# EAGLE board Wash_Hand_v1.1 (EAGLE 9.6.1)
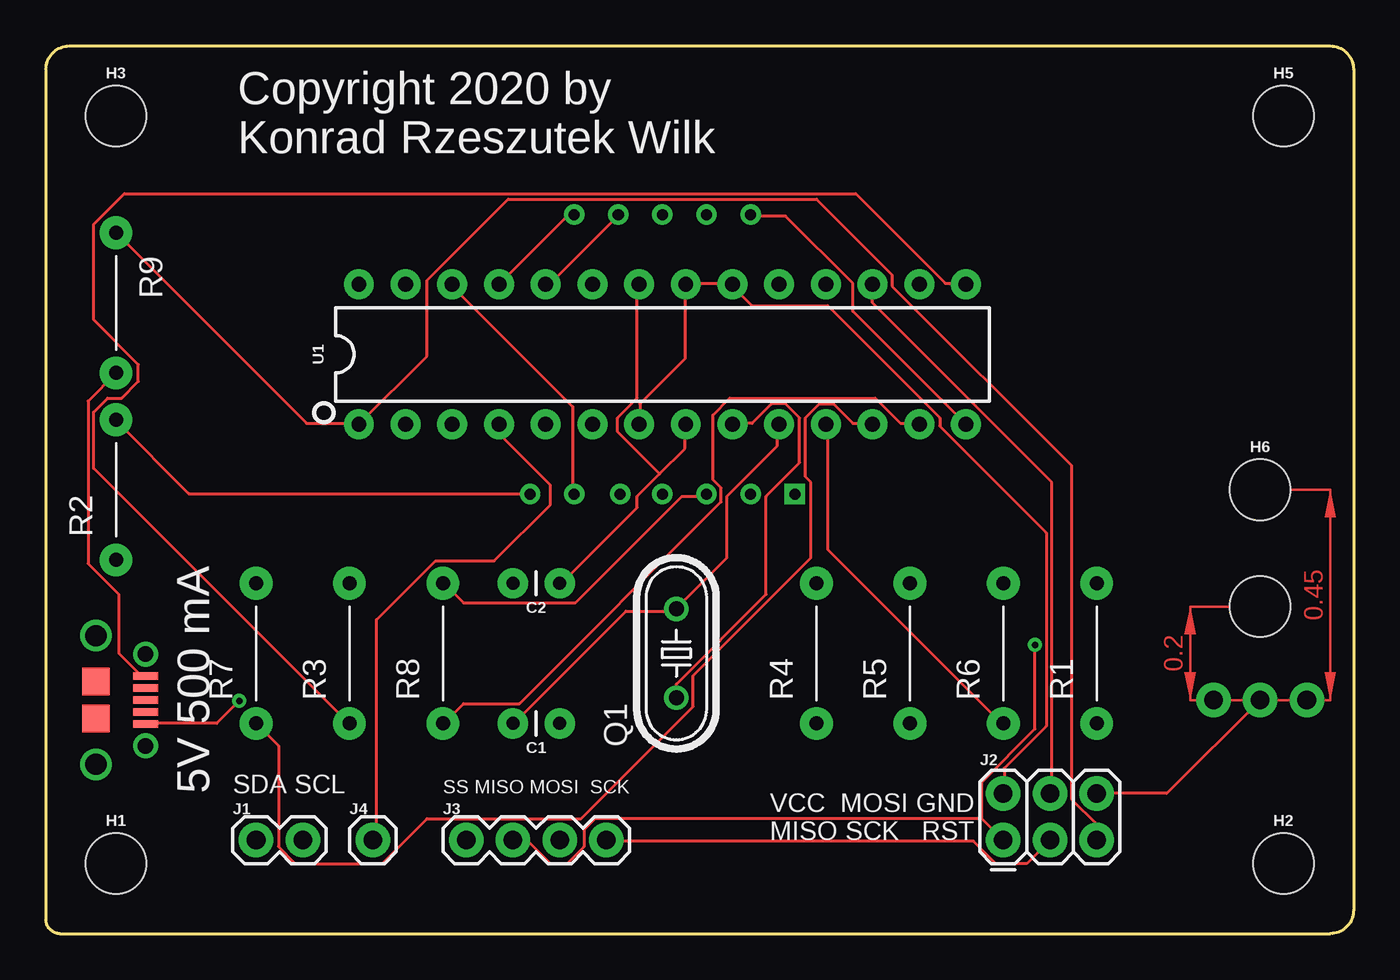
[diagram p0: board, top side]
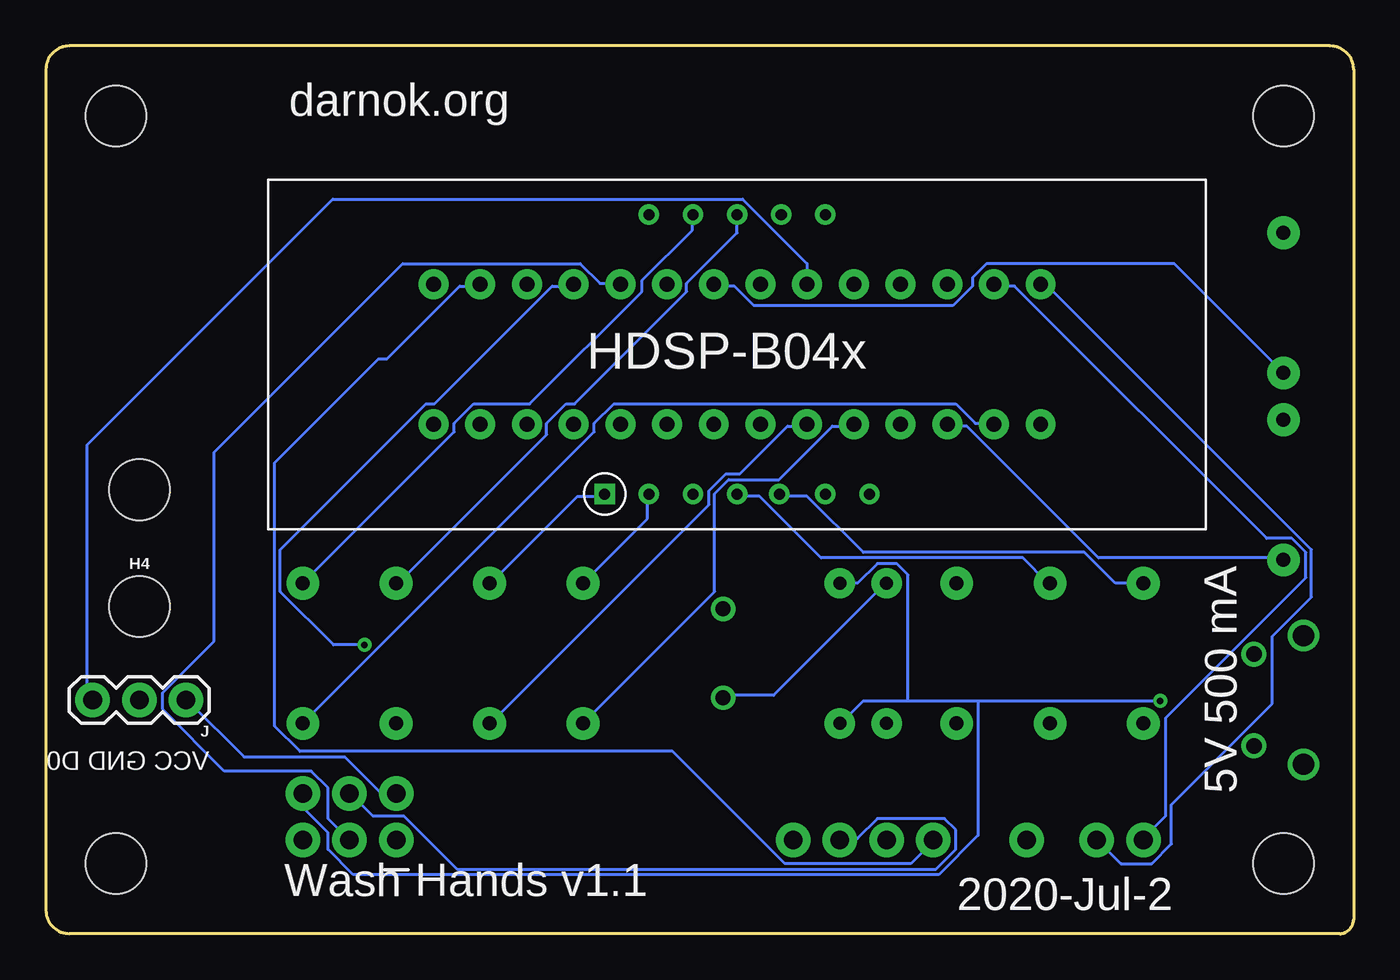
[diagram p1: board, bottom side, seen from below]

Size 71.12 x 48.26 mm. Coordinates in mm from the lower left corner, seen from the top.
Outline: 0,46.99 0,0.76 arc90 0.76,0 69.85,0 arc90 71.12,1.27 71.12,46.99 arc90 69.85,48.26 1.27,48.26 arc90 0,46.99
Copper layers (1*16): Top 0.035mm / dielectric 1.5mm / Bottom 0.035mm
Design rules "default": minimum track width 6mil, minimum drill 0.35mm, track to track 6mil, track to pad 6mil, pad to pad 6mil, via to via 6mil, smd to smd 6mil, copper to edge 40mil, drill to drill 6mil, minimum pad ring 10mil, minimum via ring 8mil, stop-mask expansion 4mil, vias tented up to drill 0mil, thermal gap 10mil

## Footprints (pad centres in the part's own frame; a part is rotated, then mirrored left to right if it is on the bottom)
CAP-PTH-2.54 = drill 0.7 pad 1.651: 1 -1.27,0; 2 1.27,0
STAND-OFF = hole 3.302: 0,0
1X03 = drill 1.016 pad 1.88: 1 0,0; 2 2.54,0; 3 5.08,0
1X02 = drill 1.016 pad 1.88: 1 0,0; 2 2.54,0
2X3 = drill 1.016 pad 1.88: 1 0,0; 2 0,2.54; 3 2.54,0; 4 2.54,2.54; 5 5.08,0; 6 5.08,2.54
1X04 = drill 1.016 pad 1.88: 1 0,0; 2 2.54,0; 3 5.08,0; 4 7.62,0
1X01 = drill 1.016 pad 1.88: 1 0,0
HC49/S = drill 0.813: 1 -2.413,0; 2 2.413,0
RESISTOR = drill 0.762 pad 1.778: R_1 0,0; R_2 7.62,0
DIP28 = drill 0.813 pad 1.626: 1 -16.51,-3.81; 2 -13.97,-3.81; 3 -11.43,-3.81; 4 -8.89,-3.81; 5 -6.35,-3.81; 6 -3.81,-3.81; 7 -1.27,-3.81; 8 1.27,-3.81; 9 3.81,-3.81; 10 6.35,-3.81; 11 8.89,-3.81; 12 11.43,-3.81; 13 13.97,-3.81; 14 16.51,-3.81; 15 16.51,3.81; 16 13.97,3.81; 17 11.43,3.81; 18 8.89,3.81; 19 6.35,3.81; 20 3.81,3.81; 21 1.27,3.81; 22 -1.27,3.81; 23 -3.81,3.81; 24 -6.35,3.81; 25 -8.89,3.81; 26 -11.43,3.81; 27 -13.97,3.81; 28 -16.51,3.81
USB_MICROB_10118194_AMPHENOL = smd 0.4 x 1.35: 1 -1.3,4.15; 2 -0.65,4.15; 3 0,4.15; 4 0.65,4.15; 5 1.3,4.15 | smd 1.5 x 1.5: P$1 -1,1.45; P$2 1,1.45 | drill 0.85 pad 1.25: P$8 -2.5,4.15; P$9 2.5,4.15 | drill 1.15 pad 1.55: P$10 -3.5,1.45; P$11 3.5,1.45
HDSP-B0XE = drill 0.6: PIN12 -4.8,7.6; PIN$2 -4.8,-7.6; PIN$3 -2.4,-7.6; PIN$4 0,-7.6; PIN$5 2.3,-7.6; PIN$6 4.8,-7.6; PIN$7 7.2,-7.6; PIN$8 4.8,7.6; PIN$9 2.4,7.6; PIN$10 0,7.6; PIN$11 -2.4,7.6 | drill 0.6 square: PIN$1 -7.2,-7.6

## Placement (x,y rotation side)
C1  22pF  [CAP-PTH-2.54]  26.67,11.43 180 top
C2  22pF  [CAP-PTH-2.54]  26.67,19.05 180 top
H1  STAND-OFF  [STAND-OFF]  3.81,3.81 0 top
H2  STAND-OFF  [STAND-OFF]  67.31,3.81 0 top
H3  STAND-OFF  [STAND-OFF]  3.81,44.45 0 top
H4  STAND-OFF  [STAND-OFF]  66.04,17.78 0 bottom
H5  STAND-OFF  [STAND-OFF]  67.31,44.45 0 top
H6  STAND-OFF  [STAND-OFF]  66.04,24.13 0 top
J  D0 GND VCC ,  [1X03]  63.5,12.7 180 bottom
J1  I2C  [1X02]  11.43,5.08 0 top
J2  ICSP  [2X3]  52.07,5.08 0 top
J3  SPI  [1X04]  22.86,5.08 0 top
J4  INTERRUPT  [1X01]  17.78,5.08 0 top
Q1  16.0 Mhz  [HC49/S]  34.29,15.24 90 top
R1  220K  [RESISTOR]  57.15,11.43 90 top
R2  220K  [RESISTOR]  3.81,20.32 90 top
R3  220K  [RESISTOR]  16.51,11.43 90 top
R4  220K  [RESISTOR]  41.91,11.43 90 top
R5  220K  [RESISTOR]  46.99,11.43 90 top
R6  220K  [RESISTOR]  52.07,11.43 90 top
R7  220K  [RESISTOR]  11.43,11.43 90 top
R8  220K  [RESISTOR]  21.59,11.43 90 top
R9  10K  [RESISTOR]  3.81,38.1 270 top
U1  328P  [DIP28]  33.53,31.5 0 top
U$4  USB_MICROB_10118194_AMPHENOL  [USB_MICROB_10118194_AMPHENOL]  1.27,12.7 270 top
U$5  HDSP-B04E  [HDSP-B0XE]  33.53,31.5 0 bottom

## Library data of the parts
C1 C2 = SparkFun-Capacitors; PROD_ID: CAP-09128
H1-H6 = SparkFun-Hardware
J J1 J4 = SparkFun-Connectors
J2 = SparkFun-Connectors; PROD_ID: CONN-11566
J3 = SparkFun-Connectors; PROD_ID: CONN-09696
Q1 = adafruit; OC_FARNELL: 1667008; OC_NEWARK: unknown
R1-R9 U$4 U$5 = PCB_CLASS_PREMADE_COMPONENTS
U1 = SparkFun-IC-Microcontroller; PROD_ID: IC-09136

## Nets
0: C1.1 C2.1 J2.6 J.2 U1.8 U1.22 U$4.5
A: R1.R_2 U$5.PIN$11
B: R2.R_2 U$5.PIN$7
C: R3.R_2 U$5.PIN$4
D: R4.R_2 U$5.PIN$2
D0: J.3 U1.23
D1: U1.14 U$5.PIN12
D2: U1.24 U$5.PIN$9
D3: U1.25 U$5.PIN$8
D4: U1.26 U$5.PIN$6
DP: R8.R_2 U$5.PIN$3
E: R5.R_2 U$5.PIN$1
F: R6.R_2 U$5.PIN$10
G: R7.R_2 U$5.PIN$5
INTERRUPT: J4.1 U1.4
MISO: J2.1 J3.2 U1.18
MOSI: J2.4 J3.3 U1.17
N$1: R3.R_1 U1.15
N$2: R1.R_1 U1.2
N$3: R5.R_1 U1.6
N$4: R7.R_1 U1.12
N$8: C1.2 Q1.2 U1.10
N$9: C2.2 Q1.1 U1.9
N$18: R8.R_1 U1.13
N$19: R6.R_1 U1.11
N$20: R4.R_1 U1.5
N$21: R2.R_1 U1.3
RESET: J2.5 R9.R_1 U1.1
SCK: J2.3 J3.4 U1.19
SCL: J1.2 U1.28
SDA: J1.1 U1.27
SS: J3.1 U1.16
VCC: J2.2 J.1 R9.R_2 U1.7 U1.20 U1.21 U$4.1

## Tracks (layer width: path | path; a pad name or v marks a point on that pad's centre or on a via)
0  (via drill 0.35)
  Top 0.152: 33.38,24.99 32.16,23.77 32.16,23.16 28.04,19.05 C2.1 | 33.38,24.99 34.75,26.36 34.75,27.58 U1.8 | 33.38,24.99 31.09,27.28 31.09,28.04 32.16,29.11 32.16,35.2 U1.22 | J2.6 60.96,7.62 J.2 | v10.52,12.65 9.3,11.43 5.49,11.43 U$4.5
  Bottom 0.152: 24.23,12.65 26.67,12.65 27.89,11.43 C1.1 | 24.23,12.65 20.42,12.65 | 20.42,12.65 v10.52,12.65 | J2.6 57.15,6.86 55.78,5.49 55.78,4.57 54.41,3.2 22.55,3.2 20.42,5.33 20.42,12.65 | C2.1 26.98,19.05 25.91,20.12 24.84,20.12 24.23,19.51 24.23,12.65
A
  Bottom 0.152: R1.R_2 48.92,27.28 48.92,27.74 47.85,28.8 44.81,28.8 38.71,34.9 38.71,35.51 35.97,38.25 35.97,39.01 U$5.PIN$11
B
  Top 0.152: U$5.PIN$7 26.21,23.93 7.77,23.93 3.81,27.89 R2.R_2
C
  Bottom 0.152: U$5.PIN$4 33.53,23.77 32.31,23.77 28.96,20.42 17.98,20.42 16.61,19.05 R3.R_2
D
  Bottom 0.152: R4.R_2 38.41,22.55 38.41,23.77 U$5.PIN$2
D0
  Bottom 0.152: U1.23 29.72,36.42 33.22,39.93 55.52,39.93 68.89,26.57 68.89,13.11 68.58,12.8 J.3
D1
  Top 0.152: U1.14 43.89,33.83 43.89,35.36 40.23,39.01 38.41,39.01 U$5.PIN12
D2
  Top 0.152: U$5.PIN$9 31.09,39.01 27.28,35.2 U1.24
D3
  Top 0.152: U1.25 28.35,39.01 28.65,39.01 U$5.PIN$8
D4
  Top 0.152: U$5.PIN$6 28.65,23.93 28.65,28.65 22.1,35.2 U1.26
DP
  Top 0.152: U$5.PIN$3 35.81,23.77 34.59,23.77 28.8,17.98 22.71,17.98 21.64,19.05 R8.R_2
E
  Bottom 0.152: U$5.PIN$1 40.84,23.77 42.22,23.77 46.94,19.05 R5.R_2
F
  Bottom 0.152: U$5.PIN$10 33.53,38.1 36.27,35.36 36.27,34.9 42.37,28.8 42.82,28.8 43.89,27.74 43.89,27.13 51.97,19.05 R6.R_2
G
  Bottom 0.152: R7.R_2 12.95,19.05 14.63,20.73 26.67,20.73 29.72,23.77 31.09,23.77 U$5.PIN$5
INTERRUPT
  Top 0.152: U1.4 24.69,27.58 24.69,27.13 27.43,24.38 27.43,23.32 24.38,20.27 21.18,20.27 17.98,17.07 17.98,5.33 17.83,5.18 J4.1
MISO  (via drill 0.35)
  Top 0.152: v53.8,15.7 53.8,11.12 50.9,8.23 50.9,6.25 | J2.1 50.9,6.25 | 50.9,6.25 29.87,6.25 29.26,5.64 29.26,4.72 28.35,3.81 27.43,3.81 26.21,5.03 25.45,5.03 J3.2
  Bottom 0.152: v53.8,15.7 55.47,15.7 58.37,18.59 58.37,20.88 50.44,28.8 49.99,28.8 43.59,35.2 42.52,35.2 U1.18
MOSI
  Top 0.152: U1.17 44.96,34.29 54.71,24.54 54.71,7.62 J2.4
  Bottom 0.152: J3.3 27.89,5.18 26.98,5.18 25.91,6.25 22.25,6.25 21.64,5.64 21.64,4.57 22.71,3.5 48.77,3.5 51.66,6.4 53.34,6.4 54.56,7.62 J2.4
N$1
  Top 0.152: U1.15 49.99,35.36 48.92,35.36 44.04,40.23 4.27,40.23 2.59,38.56 2.59,33.38 5.03,30.94 5.03,30.02 4.12,29.11 3.35,29.11 2.59,28.35 2.59,25.3 16.46,11.43 R3.R_1
N$2
  Bottom 0.152: R1.R_1 41.3,27.28 41.3,27.74 40.23,28.8 21.64,28.8 20.57,27.74 19.66,27.74 U1.2
N$3
  Bottom 0.152: U1.6 29.72,27.58 30.79,27.58 33.38,24.99 34.14,24.99 35.05,24.08 35.05,23.32 46.94,11.43 R5.R_1
N$4
  Top 0.152: R7.R_1 12.65,10.21 12.65,4.72 13.56,3.81 18.29,3.81 20.73,6.25 29.11,6.25 35.2,12.34 35.2,14.02 41.6,20.42 41.6,24.54 41.3,24.84 41.3,28.04 42.06,28.8 42.82,28.8 43.89,27.74 44.96,27.74 U1.12
N$8
  Top 0.152: C1.2 25.45,11.43 31.55,17.53 34.29,17.53 Q1.2 34.29,17.68 37.03,20.42 37.03,23.77 39.78,26.52 39.78,27.58 U1.10
N$9
  Top 0.152: Q1.1 34.29,13.56 39.17,18.44 39.17,23.77 41,25.6 41,28.04 40.23,28.8 39.47,28.8 38.41,27.74 37.34,27.74 U1.9
  Bottom 0.152: Q1.1 34.29,12.95 31.55,12.95 25.45,19.05 C2.2
N$18
  Top 0.152: U1.13 47.4,27.74 46.48,27.74 45.11,29.11 37.19,29.11 36.27,28.19 36.27,24.69 36.73,24.23 36.73,23.47 25.76,12.5 22.71,12.5 21.64,11.43 R8.R_1
N$19
  Top 0.152: U1.11 42.52,27.58 42.52,20.88 51.97,11.43 R6.R_1
N$20
  Bottom 0.152: R4.R_1 34.75,18.59 34.75,23.93 33.98,24.69 31.24,24.69 28.35,27.58 27.28,27.58 U1.5
N$21
  Bottom 0.152: U1.3 22.1,27.58 21.03,27.58 13.87,20.42 3.81,20.42 R2.R_1
RESET
  Top 0.152: R9.R_1 14.17,27.74 16.92,27.74 U1.1 20.73,31.39 20.73,35.51 25.15,39.93 41.91,39.93 46.02,35.81 46.02,35.2 55.78,25.45 55.78,7.32 57.15,5.94 J2.5
SCK
  Top 0.152: J2.3 53.34,3.81 51.66,3.81 50.44,5.03 30.48,5.03 J3.4
  Bottom 0.152: J2.3 55.78,6.25 55.78,7.92 56.69,8.84 61.42,8.84 64.77,12.19 64.77,13.11 61.98,15.9 61.98,26.16 51.71,36.42 42.06,36.42 41,35.36 39.93,35.36 U1.19
SCL
  Bottom 0.152: U1.28 16.92,35.2 16.61,35.2 2.29,20.88 2.29,18.29 4.42,16.15 4.42,12.5 9.91,7.01 9.91,4.88 10.97,3.81 12.65,3.81 13.87,5.03 J1.2
SDA
  Bottom 0.152: U1.27 19.51,35.2 18.44,35.2 4.72,21.49 3.35,21.49 2.59,20.73 2.59,19.36 10.21,11.73 10.21,6.4 11.43,5.18 J1.1
SS
  Bottom 0.152: U1.16 47.55,35.2 48.62,35.2 52.58,31.24 53.03,31.24 58.67,25.6 58.67,11.28 57.3,9.91 37.03,9.91 30.94,3.81 24.08,3.81 22.86,5.03 J3.1
VCC
  Top 0.152: U1.7 32.31,27.74 32.31,28.8 34.75,31.24 34.75,35.2 U1.21 34.9,35.36 37.34,35.36 U1.20 37.34,35.2 38.41,34.14 42.52,34.14 48.62,28.04 48.62,27.58 54.41,21.79 54.41,11.28 52.12,8.99 52.12,7.62 J2.2 | R9.R_2 2.29,28.96 2.29,20.12 3.96,18.44 3.96,15.24 5.18,14.02 5.33,14.02 U$4.1
  Bottom 0.152: J2.2 52.88,7.62 54.86,9.6 60.35,9.6 63.4,12.65 J.1 | R9.R_2 9.75,36.42 19.96,36.42 20.73,35.66 20.73,35.2 21.79,34.14 32.61,34.14 33.68,35.2 34.75,35.2 U1.21
(copper drawn outside any net)
  shapes: Top area x2

## Text on the board
tNames: Copyright 2020 by / Konrad Rzeszutek Wilk | 5V 500 mA | SDA SCL | SS MISO MOSI SCK | VCC MOSI GND / MISO SCK RST
bNames: darnok.org | VCC GND D0 | 5V 500 mA | Wash Hands v1.1 | 2020-Jul-2